# Altium PCB PCB1.PcbDoc
Units mm, origin at the board's own origin, x right, y up, seen from the top; angles counter-clockwise.
Board outline 200.03 x 200.03 mm, 2 copper layers (Top Layer, Bottom Layer); 11 components, 51 nets, 213 pads, 6 vias.
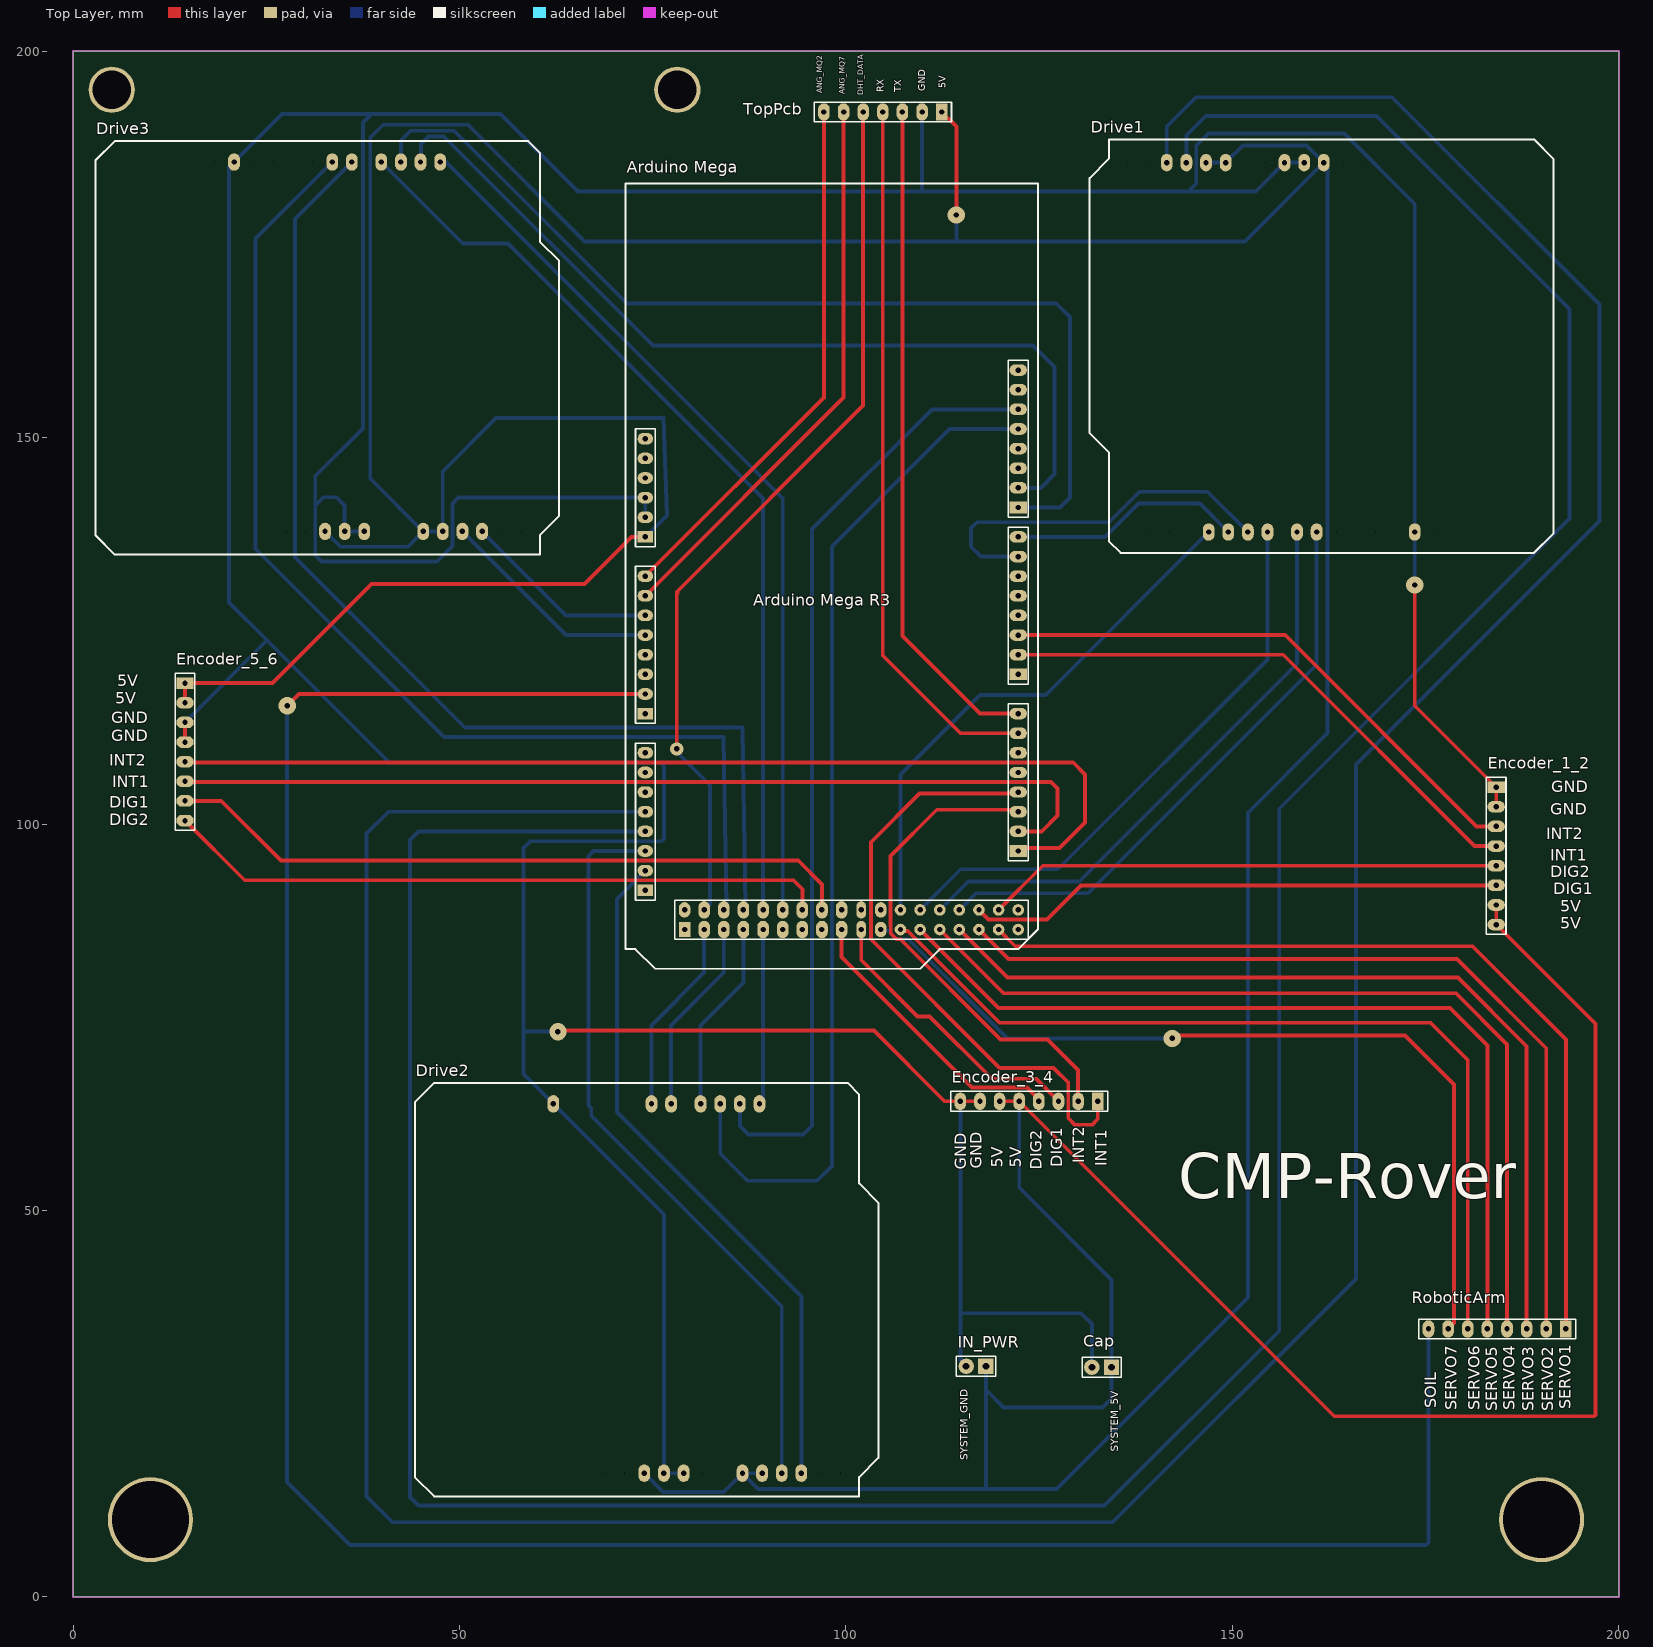
[diagram p0: Top Layer view]
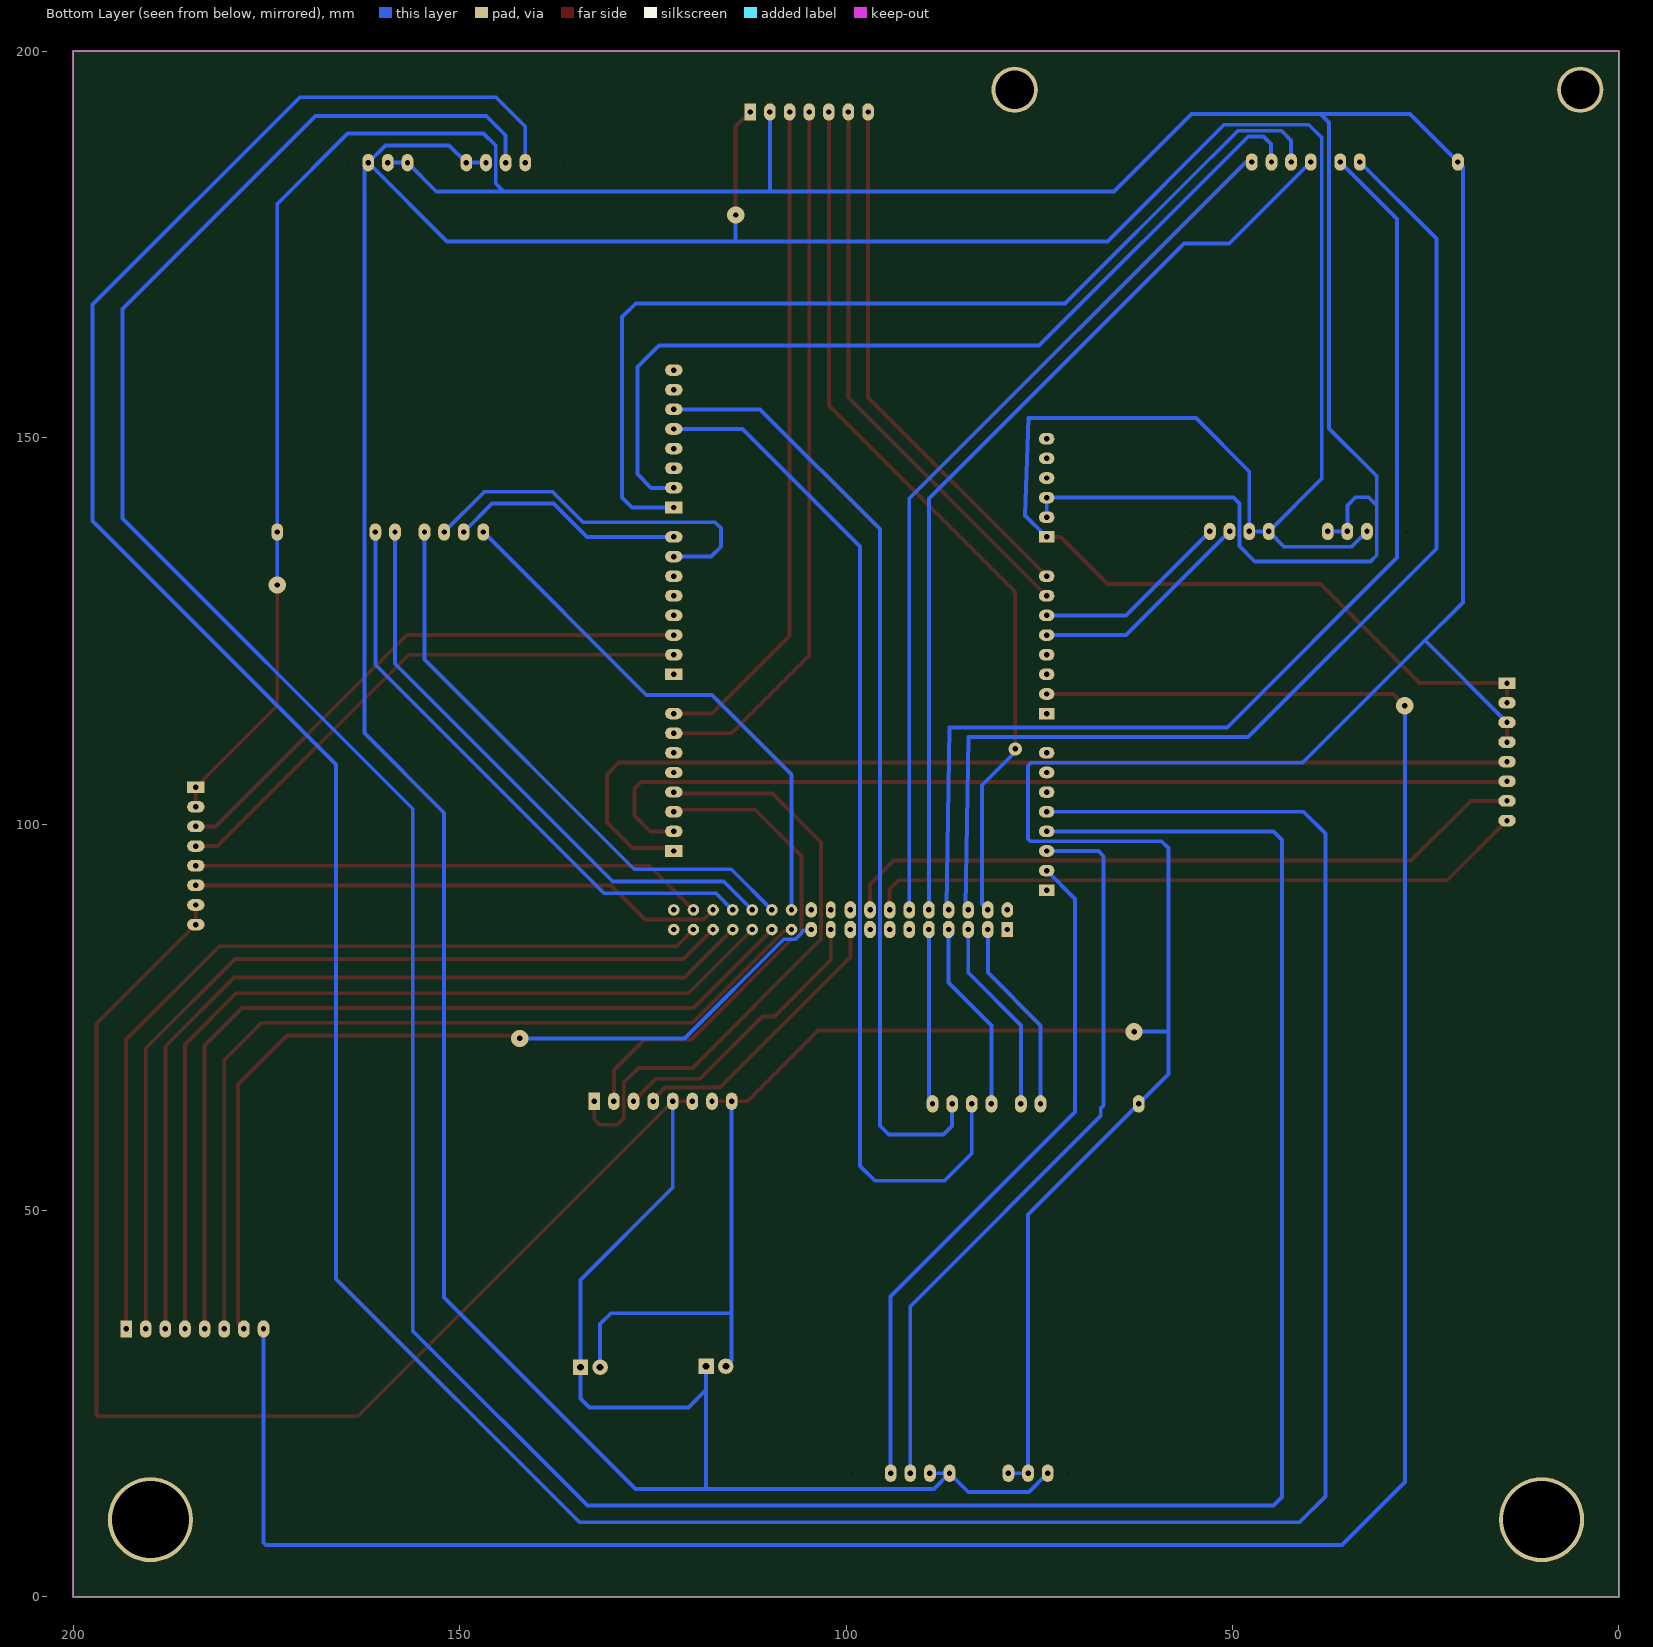
[diagram p1: Bottom Layer view, seen from below]

## Layer stack, top to bottom
Top Solder: solder mask 0.0102, Solder Resist, Dk 3.5
Top Layer: signal copper 0.0356
Dielectric 1: dielectric 0.32, FR-4, Dk 4.8
Bottom Layer: signal copper 0.0356
Bottom Solder: solder mask 0.0102, Solder Resist, Dk 3.5

## Board outline
0,0 200.025,0 200.025,200.025 0,200.025

## Design rules (kind name [scope] priority, off if disabled: settings)
Clearance [All] p1: gap=0.254 ignorepadtopadclearanceinfootprint=FALSE except(0: Arc-Hole Track-Hole SMDPad-Hole THPad-Hole Via-Hole Fill-Hole Poly-Hole Region-Hole Text-Hole)
PolygonConnect [All] p1: connectstyle=Relief reliefconductorwidth=0.254 reliefentries=4 polygonreliefangle="90 Angle" airgapwidth=0.254
RoutingVias [All] p1: holewidth=0.711 width=1.27 viastyle="Through Hole" minholewidth=0.711 minwidth=1.27 maxholewidth=0.711 maxwidth=1.27
SolderMaskExpansion [All] p1: expansion=0.102
Width [All] p1: maxlimit=0.7 minlimit=0.254 preferedwidth=0.5 minimp=50.000000 maximp=50.000000 favimp=50.000000
30 further rules are at their usual default settings.

## Components (designator, comment, footprint, x,y, rotation, side; value= is the part's Value field where it differs from the comment)
"Arduino Mega" "ARDUINO MEGA" "ARDUINO MEGA" 99.441,129.54 r270 top
Cap "Cap" HDR1X2 134.366,29.718 r180 top
Drive1 "Component_1" PCBComponent_1 191.539,186.095 r270 top
Drive2 "Component_1" PCBComponent_1 44.214,15.502 r90 top
Drive3 "Component_1" PCBComponent_1 2.898,137.374 r90 top
Encoder_1_2 "Header 8" HDR1X8 184.15,104.775 r270 top
Encoder_3_4 "Header 8" HDR1X8 132.588,64.135 r180 top
Encoder_5_6 "Header 8" HDR1X8 14.478,118.237 r270 top
IN_PWR "INPUT POWER" HDR1X2 118.11,29.845 r180 top
RoboticArm "Header 8" HDR1X8 193.167,34.671 r180 top
TopPcb "Header 7" HDR1X7 97.155,192.151 r0 top

## Footprints (in the part's own frame and the unit in brackets; to place one, negate y for a bottom-side part, rotate by r counter-clockwise, add the part's x,y. Pads: shape width x height; smd on the part's side, far side on the other; paste and mask are expansions set on the pad)
"ARDUINO MEGA" [mm] "Arduino Mega 2560"
  rect 1.5x2.25 hole 0.7: 0(10.16,22.86) 8(-11.43,22.86) 21(33.02,22.86)
  oval 1.5x2.25 hole 0.7: 1(7.62,22.86) 2(5.08,22.86) 3(2.54,22.86) 4(0,22.86) 5(-2.54,22.86) 6(-5.08,22.86) 7(-7.62,22.86) 9(-13.97,22.86) 10(-16.51,22.86) 11(-19.05,22.86) 12(-21.59,22.86) 13(-24.13,22.86) 14(15.24,22.86) 15(17.78,22.86) 16(20.32,22.86) 19(27.94,22.86) 20(30.48,22.86) 76(-26.67,22.86) 77(-29.21,22.86)
  oval 1.4x2.25 hole 0.7: 17(22.86,22.86) 18(25.4,22.86)
  round 1.5 hole 0.7: 22(40.64,20.32) 23(43.18,20.32) 24(40.64,17.78) 25(43.18,17.78) 26(40.64,15.24) 27(43.18,15.24) 28(40.64,12.7) 29(43.18,12.7) 30(40.64,10.16) 31(43.18,10.16) 32(40.64,7.62) 33(43.18,7.62) 80(43.18,22.86) 81(40.64,22.86)
  oval 2x1.5 hole 0.7: 34(40.64,5.08) 35(43.18,5.08) 78(40.64,-20.32)
  oval 2.25x1.2 hole 0.7: 36(40.64,2.54) 37(43.18,2.54)
  oval 2.25x1.5 hole 0.7: 38(40.64,0) 39(43.18,0) 40(40.64,-2.54) 41(43.18,-2.54) 42(40.64,-5.08) 43(43.18,-5.08) 44(40.64,-7.62) 45(43.18,-7.62) 46(40.64,-10.16) 47(43.18,-10.16) 48(40.64,-12.7) 49(43.18,-12.7) 50(40.64,-15.24) 51(43.18,-15.24) 52(40.64,-17.78) 53(43.18,-17.78)
  oval 1.5x2 hole 0.7: 54(-20.32,-25.4) 55(-17.78,-25.4) 56(-15.24,-25.4) 57(-12.7,-25.4) 58(-10.16,-25.4) 60(-2.54,-25.4) 61(0,-25.4) 62(2.54,-25.4) 63(5.08,-25.4) 64(7.62,-25.4) 65(10.16,-25.4) 66(12.7,-25.4) 68(20.32,-25.4) 69(22.86,-25.4) 70(25.4,-25.4) 71(27.94,-25.4) 72(30.48,-25.4) 73(33.02,-25.4) 74(35.56,-25.4)
  rect 1.5x2 hole 0.7: 59(-7.62,-25.4) 67(15.24,-25.4) 75(38.1,-25.4)
  rect 2x1.5 hole 0.7: 79(43.18,-20.32)
  silkscreen extent -53.34,-27.94 48.26,25.4
HDR1X2 [mm] "Connector; Header; 2 Position"
  rect 2x2 hole 0.9: 1(0,0)
  round 2 hole 0.9: 2(2.54,0)
  silkscreen extent -1.27,-1.27 3.81,1.27
HDR1X7 [mm] "Connector; Header; 7 Position"
  oval 1.5x2.25 hole 0.7: 1(0,0) 2(2.54,0) 3(5.08,0) 4(7.62,0) 5(10.16,0) 6(12.7,0)
  rect 1.5x2.25 hole 0.7: 7(15.24,0)
  silkscreen extent -1.27,-1.27 16.51,1.27
HDR1X8 [mm] "Connector; Header; 8 Position"
  rect 1.5x2.25 hole 0.7: 1(0,0)
  oval 1.5x2.25 hole 0.7: 2(2.54,0) 3(5.08,0) 4(7.62,0) 5(10.16,0) 6(12.7,0) 7(15.24,0) 8(17.78,0)
  silkscreen extent -1.27,-1.27 19.05,1.27
PCBComponent_1 [mm]
  oval 2.25x1.524 hole 0.7: 0Analog(0.5,-42.4) 1Analog(0.5,-44.94) 2Analog(0.5,-47.48) 3Analog(0.5,-50.02) 4(48.3,-44.6) 5(48.3,-42.06) 5V(0.5,-29.7) 6(48.3,-39.52) 7(48.3,-36.98) 8(48.3,-33.17) 9(48.3,-30.63) GND0(0.5,-34.78) GND1(0.5,-32.24) GND2(48.3,-17.93)
  round 0 hole 0.1: 2(48.3,-49.68) 3(48.3,-47.14) 3.3V(0.5,-27.16) 4Analog(0.5,-52.56) 5Analog(0.5,-55.1) 10(48.3,-28.09) 11(48.3,-25.55) 12(48.3,-23.01) 13(48.3,-20.47) AREF(48.3,-15.39) RST(0.5,-24.62) RX(48.3,-54.76) TX(48.3,-52.22) Vin(0.5,-37.32)
  silkscreen extent -2.5,-60 51,0, body extent -2.35,-60.05 50.95,-0.15, height 10.9

## Part data
Cap IN_PWR: library part "Header 2", "Header, 2-Pin", LatestRevisionDate=17-Jul-2002, LatestRevisionNote="Re-released for DXP Platform.", Publisher="Altium Limited"
Encoder_1_2 Encoder_3_4 Encoder_5_6 RoboticArm: "Header, 8-Pin", LatestRevisionDate=17-Jul-2002, LatestRevisionNote="Re-released for DXP Platform.", Publisher="Altium Limited"
TopPcb: "Header, 7-Pin", LatestRevisionDate=17-Jul-2002, LatestRevisionNote="Re-released for DXP Platform.", Publisher="Altium Limited"

## Free pads (board coordinates)
  round 6 hole 5: 12(78.185,195.025) HOLE3(5,195.025)
  round 11 hole 10: 13(190.025,10) HOLE1(10,10)

## Via types
v1: diameter 2.25, hole 0.7, Top Layer to Bottom Layer, 5 vias
v2: diameter 1.7, hole 0.7, Top Layer to Bottom Layer, 1 vias

## Nets (pads, with @x,y where several pads share a name; then routed paths per layer and width w, separated by ;. In a path a pad name is that pad's centre, name@x,y a point inside that pad or via, vN(x,y) a via of type N, cw(c..) or ccw(c..) an arc to the next point about the centre after c; other vN are vias at no path point)
5: "Arduino Mega.59" Cap.1 Drive1.0Analog Drive1.1Analog Drive1.5V Drive2.0Analog Drive2.1Analog Drive2.5V Drive3.0Analog Drive3.1Analog Drive3.5V Encoder_1_2.7 Encoder_1_2.8 Encoder_3_4.5 Encoder_3_4.6 Encoder_5_6.1 Encoder_5_6.2 IN_PWR.1 TopPcb.7 | length 852.9
  Top Layer w0.5: Encoder_5_6.2 Encoder_5_6.1 25.781,118.237 38.608,131.064 66.167,131.064 72.263,137.16 74.041,137.16 ; TopPcb.7 114.3,190.246 v1(114.3,178.816) ; Encoder_3_4.6 Encoder_3_4.5 163.195,23.368 196.811,23.368 196.977,23.534 196.977,74.168 Encoder_1_2.8 Encoder_1_2.7
  Bottom Layer w0.5: Drive3.5V 34.582,135.89 43.314,135.89 Drive3.0Analog ; Drive2.5V 76.327,13.589 84.201,13.589 Drive2.0Analog ; 74.041,137.16 76.835,139.954 76.415,152.527 54.737,152.527 47.838,145.628 Drive3.1Analog Drive3.0Analog ; Drive2.1Analog Drive2.0Analog ; v1(114.3,178.816) 114.3,175.406 ; IN_PWR.1 118.11,26.797 ; Encoder_3_4.5 122.428,52.959 134.366,41.021 Cap.1 134.366,25.654 133.223,24.511 120.396,24.511 118.11,26.797 ; Drive1.1Analog Drive1.0Analog 151.377,187.833 159.601,187.833 Drive1.5V ; Drive3.0Analog 38.456,144.716 38.456,188.824 40.132,190.5 51.075,190.5 66.17,175.406 114.3,175.406 ; Drive2.0Analog 88.646,13.97 118.11,13.97 ; 114.3,175.406 151.65,175.406 Drive1.5V ; 118.11,13.97 118.11,26.797 ; 118.11,13.97 127.254,13.97 152.019,38.735 152.019,101.473 162.331,111.785 162.331,184.825 161.839,185.318 Drive1.5V
ANG_MQ2: "Arduino Mega.60" TopPcb.1 | length 69.6
  Top Layer w0.5: 74.041,132.08 97.155,155.194 TopPcb.1
ANG_MQ7: "Arduino Mega.61" TopPcb.2 | length 73.2
  Top Layer w0.5: 74.041,129.54 99.695,155.194 TopPcb.2
Current_sensor_1_1: "Arduino Mega.72" Drive1.2Analog | length 450.6
  Bottom Layer w0.5: 74.041,99.06 44.704,99.06 43.6,97.956 43.6,12.915 44.704,11.811 133.477,11.811 156.083,34.417 156.083,101.981 193.634,139.532 193.634,166.665 168.656,191.643 146.558,191.643 144.059,189.144 Drive1.2Analog
Current_sensor_1_2: "Arduino Mega.71" Drive1.3Analog | length 478
  Bottom Layer w0.5: 74.041,101.6 40.806,101.6 37.973,98.767 37.973,12.993 41.314,9.652 134.493,9.652 165.989,41.148 165.989,107.696 197.511,139.218 197.511,167.233 170.688,194.056 145.288,194.056 141.519,190.287 Drive1.3Analog
Current_sensor_2_1: "Arduino Mega.74" Drive2.3Analog | length 89.4
  Bottom Layer w0.5: 74.041,93.98 70.358,90.297 70.358,62.738 94.234,38.862 Drive2.3Analog
Current_sensor_2_2: "Arduino Mega.73" Drive2.2Analog | length 97.9
  Bottom Layer w0.5: 74.041,96.52 67.349,96.52 66.67,95.841 66.67,63.573 67.056,63.187 67.056,62.213 91.694,37.575 Drive2.2Analog
Current_sensor_3_1: "Arduino Mega.62" Drive3.3Analog | length 25.6
  Bottom Layer w0.5: Drive3.3Analog 63.792,127 74.041,127
Current_sensor_3_2: "Arduino Mega.63" Drive3.2Analog | length 29.2
  Bottom Layer w0.5: Drive3.2Analog 63.792,124.46 74.041,124.46
DHT_DATA: "Arduino Mega.52" TopPcb.3 | length 115.5
  Top Layer w0.5: v2(78.105,109.728) 78.105,129.794 78.232,129.921 78.105,130.048 102.235,154.178 TopPcb.3
  Bottom Layer w0.5: v2(78.105,109.728) 78.105,109.347 82.423,105.029 82.423,89.662 81.661,88.9
DRIVE_1_4: "Arduino Mega.32" Drive1.4 | length 70.4
  Bottom Layer w0.5: 107.061,88.9 107.061,106.401 117.373,116.713 125.857,116.713 Drive1.4
DRIVE_1_5: "Arduino Mega.7" Drive1.5 | length 30.5
  Bottom Layer w0.5: 122.301,137.16 133.528,137.16 137.846,141.478 145.796,141.478 Drive1.5
DRIVE_1_6: "Arduino Mega.6" Drive1.6 | length 49
  Bottom Layer w0.5: 122.301,134.62 117.475,134.62 116.205,135.89 116.205,138.303 116.967,139.065 134.061,139.065 137.998,143.002 146.812,143.002 Drive1.6
DRIVE_1_7: "Arduino Mega.30" Drive1.7 | length 74.9
  Bottom Layer w0.5: 109.601,88.9 114.859,94.158 127.406,94.158 154.559,121.31 Drive1.7
DRIVE_1_8: "Arduino Mega.28" Drive1.8 | length 76.5
  Bottom Layer w0.5: 112.141,88.9 115.824,92.583 130.2,92.583 158.369,120.752 Drive1.8
DRIVE_1_9: "Arduino Mega.26" Drive1.9 | length 76.5
  Bottom Layer w0.5: 114.681,88.9 116.84,91.059 131.343,91.059 160.909,120.625 Drive1.9
DRIVE_2_4: "Arduino Mega.47" Drive2.4 | length 22.8
  Bottom Layer w0.5: Drive2.4 88.814,64.079 89.281,64.546 89.281,86.36
DRIVE_2_5: "Arduino Mega.13" Drive2.5 | length 123.5
  Bottom Layer w0.5: Drive2.5 86.274,60.919 87.376,59.817 94.488,59.817 95.631,60.96 95.631,138.176 111.125,153.67 122.301,153.67
DRIVE_2_6: "Arduino Mega.12" Drive2.6 | length 133.7
  Bottom Layer w0.5: Drive2.6 83.734,57.363 87.249,53.848 96.266,53.848 98.187,55.769 98.187,135.906 113.411,151.13 122.301,151.13
DRIVE_2_7: "Arduino Mega.49" Drive2.7 | length 24.9
  Bottom Layer w0.5: Drive2.7 81.194,73.955 86.741,79.502 86.741,86.36
DRIVE_2_8: "Arduino Mega.51" Drive2.8 | length 25.4
  Bottom Layer w0.5: Drive2.8 77.384,73.955 84.201,80.772 84.201,86.36
DRIVE_2_9: "Arduino Mega.53" Drive2.9 | length 25.4
  Bottom Layer w0.5: Drive2.9 74.844,73.955 81.661,80.772 81.661,86.36
DRIVE_3_4: "Arduino Mega.44" Drive3.4 | length 115.6
  Bottom Layer w0.5: Drive3.4 48.26,185.674 91.821,142.113 91.821,88.9
DRIVE_3_5: "Arduino Mega.9" Drive3.5 | length 116.4
  Bottom Layer w0.5: Drive3.5 45.006,185.722 45.006,188.008 45.97,188.972 47.969,188.972 75.016,161.925 124.206,161.925 127,159.131 127,145.288 125.222,143.51 122.301,143.51
DRIVE_3_6: "Arduino Mega.8" Drive3.6 | length 130.5
  Bottom Layer w0.5: Drive3.6 42.418,188.468 43.676,189.726 49.288,189.726 52.786,186.228 52.807,186.228 71.649,167.386 127.215,167.386 128.993,165.608 128.993,142.24 127.723,140.97 122.301,140.97
DRIVE_3_7: "Arduino Mega.46" Drive3.7 | length 120.7
  Bottom Layer w0.5: Drive3.7 50.416,175.136 56.283,175.136 89.281,142.138 89.281,88.9
DRIVE_3_8: "Arduino Mega.48" Drive3.8 | length 145
  Bottom Layer w0.5: Drive3.8 28.702,178.308 28.702,134.493 50.673,112.522 86.61,112.522 86.992,89.168 86.741,88.9
DRIVE_3_9: "Arduino Mega.50" Drive3.9 | length 147.3
  Bottom Layer w0.5: Drive3.9 23.622,175.768 23.622,135.636 48.006,111.252 84.175,111.252 84.527,89.248 84.201,88.9
Encoder_1_DIG_1: "Arduino Mega.24" Encoder_1_2.6 | length 69.3
  Top Layer w0.5: 117.221,88.9 118.475,87.646 126,87.646 130.429,92.075 Encoder_1_2.6
Encoder_1_DIG_2: "Arduino Mega.22" Encoder_1_2.5 | length 66.8
  Top Layer w0.5: 119.761,88.9 125.476,94.615 Encoder_1_2.5
Encoder_1_INT_1: "Arduino Mega.1" Encoder_1_2.4 | length 72.1
  Top Layer w0.5: 122.301,121.92 156.591,121.92 181.356,97.155 Encoder_1_2.4
Encoder_1_INT_2: "Arduino Mega.2" Encoder_1_2.3 | length 72.1
  Top Layer w0.5: 122.301,124.46 156.845,124.46 181.61,99.695 Encoder_1_2.3
Encoder_2_DIG_1: "Arduino Mega.37" Encoder_3_4.3 | length 37
  Top Layer w0.5: 101.981,86.36 101.981,82.423 109.283,75.12 110.807,75.12 118.872,67.056 124.587,67.056 Encoder_3_4.3
Encoder_2_DIG_2: "Arduino Mega.39" Encoder_3_4.4 | length 37
  Top Layer w0.5: 99.441,86.36 99.441,82.804 116.332,65.913 123.444,65.913 124.777,64.58 124.777,64.326 Encoder_3_4.4
Encoder_2_INT_1: "Arduino Mega.18" Encoder_3_4.1 | length 78.9
  Top Layer w0.5: 122.301,104.14 122.119,103.958 109.546,103.958 103.235,97.647 103.235,85.106 119.888,68.453 126.873,68.453 128.778,66.548 128.778,61.976 129.667,61.087 131.826,61.087 132.588,61.849 Encoder_3_4.1
Encoder_2_INT_2: "Arduino Mega.19" Encoder_3_4.2 | length 65
  Top Layer w0.5: 122.301,101.6 122.047,101.854 111.76,101.854 105.791,95.885 105.791,86.895 105.807,86.879 105.807,85.841 106.542,85.106 107.045,85.106 120.015,72.136 126.111,72.136 130.048,68.199 Encoder_3_4.2 Encoder_3_4.2@130.048,64.396
Encoder_3_DIG_1: "Arduino Mega.40" Encoder_5_6.7 | length 90.2
  Top Layer w0.5: Encoder_5_6.7 19.177,102.997 26.908,95.266 93.837,95.266 96.901,92.202 96.901,88.9
Encoder_3_DIG_2: "Arduino Mega.42" Encoder_5_6.8 | length 86.2
  Top Layer w0.5: Encoder_5_6.8 22.209,92.726 93.202,92.726 94.361,91.567 94.361,88.9
Encoder_3_INT_1: "Arduino Mega.20" Encoder_5_6.6 | length 122.7
  Top Layer w0.5: Encoder_5_6.6 14.589,105.426 126.564,105.426 127.381,104.609 127.381,101.092 125.349,99.06 122.301,99.06
Encoder_3_INT_2: "Arduino Mega.21" Encoder_5_6.5 | length 133.5
  Top Layer w0.5: Encoder_5_6.5 14.589,107.966 128.127,107.966 128.143,107.95 129.413,107.95 130.921,106.442 130.921,100.187 127.619,96.885 122.666,96.885 122.301,96.52
GND: "Arduino Mega.57" "Arduino Mega.58" Cap.2 Drive1.GND0 Drive1.GND1 Drive1.GND2 Drive2.GND0 Drive2.GND1 Drive2.GND2 Drive3.GND0 Drive3.GND1 Drive3.GND2 Encoder_1_2.1 Encoder_1_2.2 Encoder_3_4.7 Encoder_3_4.8 Encoder_5_6.3 Encoder_5_6.4 IN_PWR.2 TopPcb.6 | length 781.6
  Top Layer w0.5: Encoder_5_6.4 Encoder_5_6.3 ; v1(62.738,73.152) 62.865,73.279 103.632,73.279 112.776,64.135 Encoder_3_4.8 Encoder_3_4.7 ; v1(173.609,130.937) 173.609,115.316 Encoder_1_2.1 Encoder_1_2.2
  Bottom Layer w0.5: Encoder_5_6.3 24.975,123.654 25.229,123.654 ; Drive3.GND0 Drive3.GND1 35.121,137.891 35.121,141.245 34.073,142.293 32.401,142.293 31.332,141.224 ; 38.481,191.897 27.051,191.897 Drive3.GND2 20.193,185.039 20.193,128.69 25.229,123.654 ; v1(62.738,73.152) 58.293,73.152 ; 74.041,139.7 74.041,142.24 49.86,142.24 49.104,141.484 49.104,135.972 47.117,133.985 32.133,133.985 31.332,134.786 31.332,141.224 ; Drive2.GND0 Drive2.GND1 76.454,49.492 Drive2.GND2 58.293,67.653 58.293,73.152 ; TopPcb.6 109.855,181.864 ; Encoder_3_4.8 114.808,36.703 ; IN_PWR.2@115.761,29.273 115.761,29.654 IN_PWR.2 114.808,30.607 114.808,36.703 ; Cap.2 131.826,35.306 130.429,36.703 114.808,36.703 ; Drive1.GND1 Drive1.GND0 153.028,181.864 144.317,181.864 ; v1(173.609,130.937) Drive1.GND2 173.609,180.264 164.516,189.357 146.902,189.357 145.333,187.788 145.333,182.88 144.317,181.864 ; 25.229,123.654 40.949,107.934 76.05,107.934 76.438,107.546 76.438,98.067 76.145,97.774 59.166,97.774 58.293,96.901 58.293,73.152 ; 31.332,141.224 31.332,145.043 37.49,151.202 37.49,190.779 38.608,191.897 55.296,191.897 65.329,181.864 109.855,181.864 ; 109.855,181.864 144.317,181.864
RX: "Arduino Mega.15" TopPcb.4 | length 92
  Top Layer w0.5: TopPcb.4 104.775,121.793 114.808,111.76 122.301,111.76
SERVO1: "Arduino Mega.23" RoboticArm.1 | length 116.8
  Top Layer w0.5: 119.761,86.36 121.92,84.201 181.102,84.201 193.167,72.136 RoboticArm.1
SERVO2: "Arduino Mega.25" RoboticArm.2 | length 116.1
  Top Layer w0.5: 117.221,86.36 121.031,82.55 179.07,82.55 190.627,70.993 RoboticArm.2
SERVO3: "Arduino Mega.27" RoboticArm.3 | length 116.2
  Top Layer w0.5: 114.681,86.36 120.904,80.137 179.197,80.137 188.087,71.247 RoboticArm.3
SERVO4: "Arduino Mega.29" RoboticArm.4 | length 116.4
  Top Layer w0.5: 112.141,86.36 120.396,78.105 178.943,78.105 185.547,71.501 RoboticArm.4
SERVO5: "Arduino Mega.31" RoboticArm.5 | length 116.3
  Top Layer w0.5: 109.601,86.36 119.761,76.2 178.181,76.2 183.007,71.374 RoboticArm.5
SERVO6: "Arduino Mega.33" RoboticArm.6 | length 115.2
  Top Layer w0.5: 107.061,86.36 107.241,86.18 108.003,86.18 119.888,74.295 175.641,74.295 180.467,69.469 RoboticArm.6
SERVO7: "Arduino Mega.35" RoboticArm.7 | length 114.8
  Top Layer w0.5: v1(142.24,72.263) 142.448,72.263 142.829,72.644 172.339,72.644 178.689,66.294 178.689,35.464 177.927,34.702 RoboticArm.7
  Bottom Layer w0.5: 104.521,86.36 104.649,86.232 105.514,86.232 105.807,85.939 105.807,85.841 106.542,85.106 108.061,85.106 120.904,72.263 v1(142.24,72.263)
SOIL: "Arduino Mega.66" RoboticArm.8 | length 326.3
  Top Layer w0.5: v1(27.686,115.316) 29.21,116.84 74.041,116.84
  Bottom Layer w0.5: v1(27.686,115.316) 27.686,14.859 35.814,6.731 175.094,6.731 175.387,7.024 RoboticArm.8
TX: "Arduino Mega.14" TopPcb.5 | length 87
  Top Layer w0.5: TopPcb.5 107.315,124.333 117.348,114.3 122.301,114.3
pads on no net: "Arduino Mega.0" "Arduino Mega.3" "Arduino Mega.4" "Arduino Mega.5" "Arduino Mega.10" "Arduino Mega.11" "Arduino Mega.16" "Arduino Mega.17" "Arduino Mega.34" "Arduino Mega.36" "Arduino Mega.38" "Arduino Mega.41" "Arduino Mega.43" "Arduino Mega.45" "Arduino Mega.54" "Arduino Mega.55" "Arduino Mega.56" "Arduino Mega.64" "Arduino Mega.65" "Arduino Mega.67" "Arduino Mega.68" "Arduino Mega.69" "Arduino Mega.70" "Arduino Mega.75" "Arduino Mega.76" "Arduino Mega.77" "Arduino Mega.78" "Arduino Mega.79" "Arduino Mega.80" "Arduino Mega.81" Drive1.2 Drive1.3 Drive1.3.3V Drive1.4Analog Drive1.5Analog Drive1.10 Drive1.11 Drive1.12 Drive1.13 Drive1.AREF Drive1.RST Drive1.RX Drive1.TX Drive1.Vin Drive2.2 Drive2.3 Drive2.3.3V Drive2.4Analog Drive2.5Analog Drive2.10 Drive2.11 Drive2.12 Drive2.13 Drive2.AREF Drive2.RST Drive2.RX Drive2.TX Drive2.Vin Drive3.2 Drive3.3 Drive3.3.3V Drive3.4Analog Drive3.5Analog Drive3.10 Drive3.11 Drive3.12 Drive3.13 Drive3.AREF Drive3.RST Drive3.RX Drive3.TX Drive3.Vin

## Keep-outs
Keep-Out Layer:
  the board outline again, w0.254

## Silkscreen, mask and mechanical layers (free items; w line width, h text height)
Top Overlay:
  text "5V" at 112.903,195.199 h0.9 r90
  text "GND" at 110.236,194.818 h0.9 r90
  text "RX" at 104.902,194.691 h0.9 r90
  text "TX" at 107.188,194.691 h0.9 r90
  text "ANG_MQ2" at 96.911,194.564 h0.7 r90
  text "ANG_MQ7" at 99.832,194.437 h0.7 r90
  text "DHT_DATA" at 102.245,194.31 h0.7 r90
  text "5V" at 5.715,117.856 h1.52
  text "5V" at 5.461,115.57 h1.52
  text "GND" at 4.953,113.03 h1.52
  text "GND" at 4.953,110.744 h1.52
  text "INT2" at 4.699,107.569 h1.52
  text "INT1" at 5.08,104.775 h1.52
  text "GND" at 191.262,104.14 h1.52
  text "DIG1" at 4.699,102.108 h1.52
  text "GND" at 191.135,101.219 h1.52
  text "DIG2" at 4.699,99.822 h1.52
  text "INT2" at 190.627,98.044 h1.52
  text "INT1" at 191.135,95.25 h1.52
  text "DIG2" at 191.135,93.091 h1.52
  text "DIG1" at 191.516,90.932 h1.52
  text "5V" at 192.405,88.646 h1.52
  text "5V" at 192.405,86.487 h1.52
  text "INT2" at 130.81,56.134 h1.52 r90
  text "INT1" at 133.731,55.753 h1.52 r90
  text "DIG1" at 128.016,55.626 h1.52 r90
  text "5V" at 120.269,55.499 h1.52 r90
  text "5V" at 122.682,55.499 h1.52 r90
  text "GND" at 117.602,55.372 h1.52 r90
  text "GND" at 115.57,55.245 h1.52 r90
  text "DIG2" at 125.349,55.245 h1.52 r90
  text "CMP-Rover" at 143.002,49.657 h10
  text "SOIL" at 176.403,24.384 h1.52 r90
  text "SERVO1" at 193.802,24.257 h1.52 r90
  text "SERVO7" at 179.07,24.13 h1.52 r90
  text "SERVO6" at 181.991,24.13 h1.52 r90
  text "SERVO4" at 186.563,24.13 h1.52 r90
  text "SERVO5" at 184.277,24.003 h1.52 r90
  text "SERVO3" at 188.976,24.003 h1.52 r90
  text "SERVO2" at 191.516,24.003 h1.52 r90
  text "SYSTEM_5V" at 135.215,18.796 h1 r90
  text "SYSTEM_GND" at 115.784,17.653 h1 r90

## Text inside footprints (layer, text, board x,y; h text height)
"Arduino Mega": Top Overlay "Arduino Mega R3" at 88.011,128.27 h1.52